# Altium PCB PCB2.PcbDoc (part 1 of 3)
Units mil, origin at the board's own origin, x right, y up, seen from the top; angles counter-clockwise.
Board outline 6000 x 4000 mil, 2 copper layers (Top Layer, Bottom Layer); 202 components, 201 nets, 407 pads, 100 vias.
Unrouted connection lines stored in the file: 105.
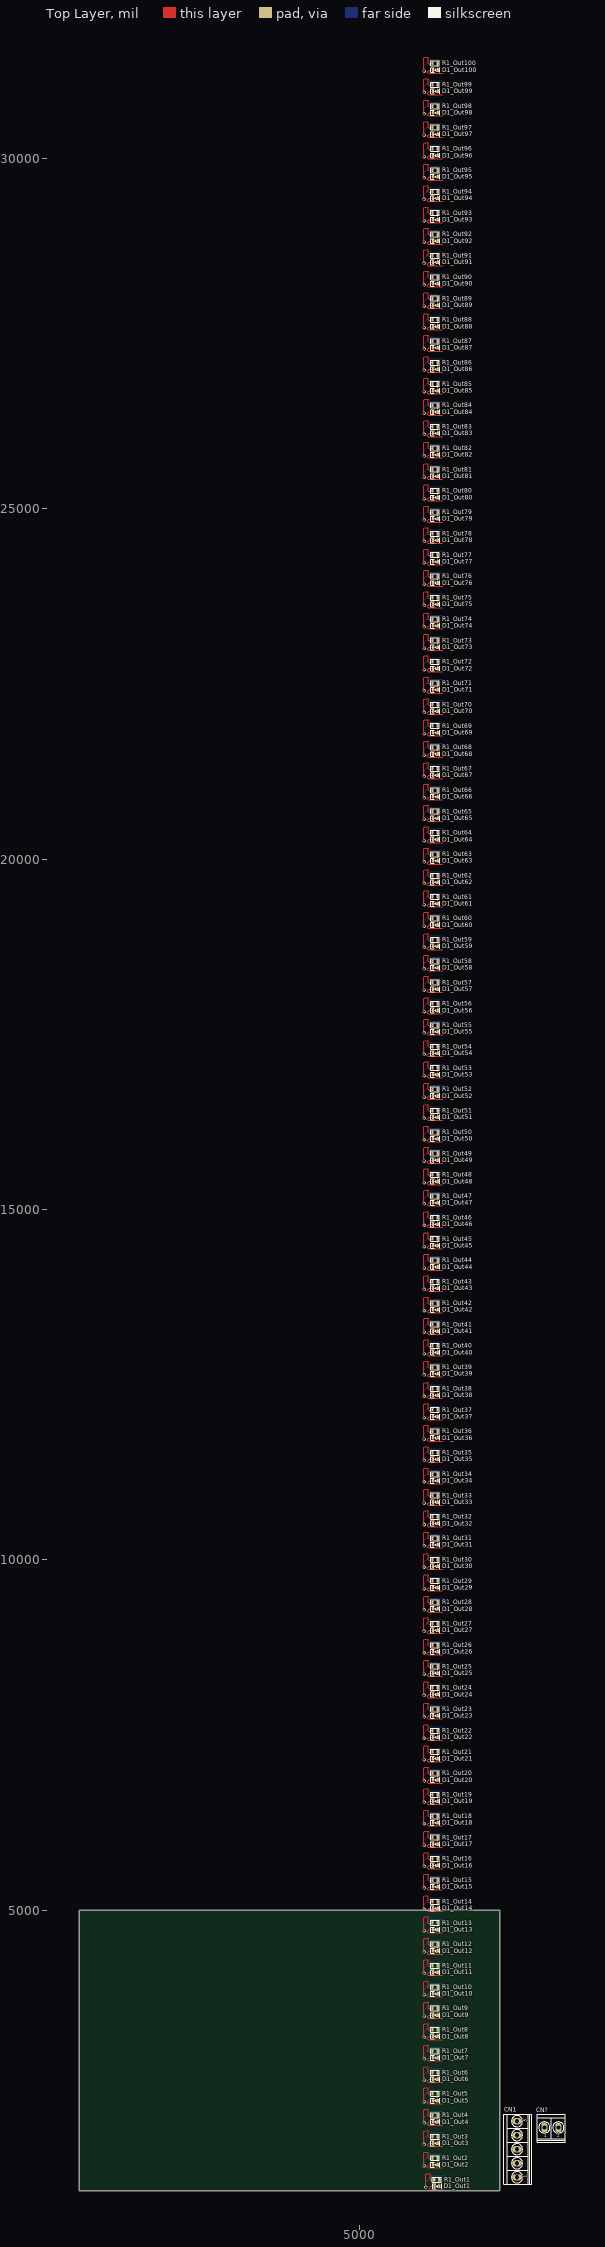
[diagram p0: Top Layer view]
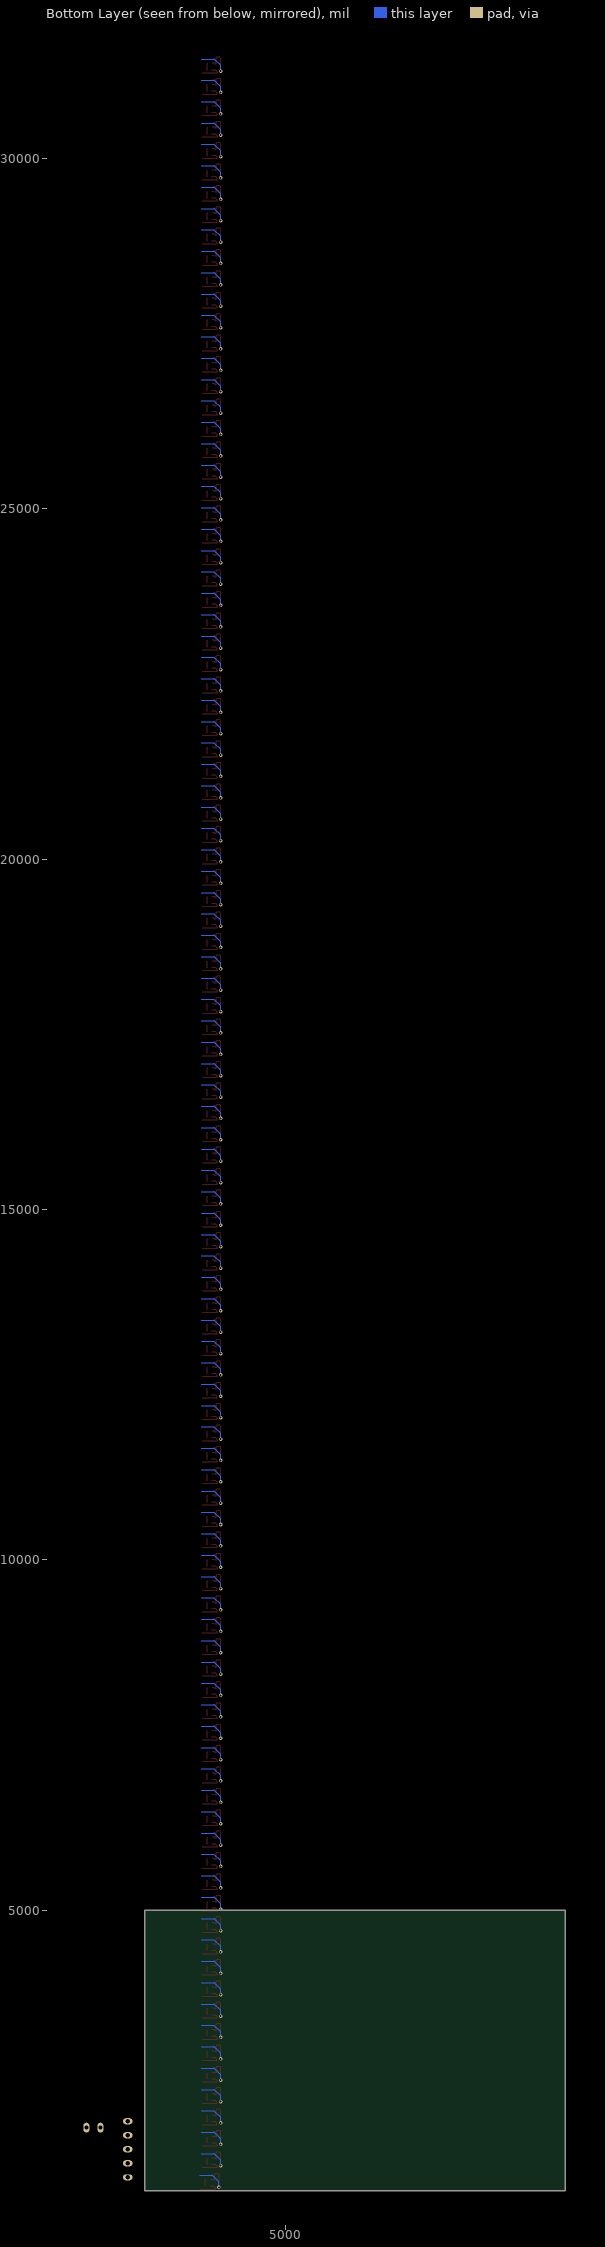
[diagram p1: Bottom Layer view, seen from below]

## Layer stack, top to bottom
Top Solder: solder mask 0.4, Solder Resist, Dk 3.5
Top Layer: signal copper 1.4
Dielectric 1: dielectric 12.6, FR-4, Dk 4.8
Bottom Layer: signal copper 1.4
Bottom Solder: solder mask 0.4, Solder Resist, Dk 3.5

## Board outline
1000,1000 7000,1000 7000,5000 1000,5000

## Design rules (kind name [scope] priority, off if disabled: settings)
Clearance [All] p1: gap=10 ignorepadtopadclearanceinfootprint=FALSE except(0: Arc-Hole Track-Hole SMDPad-Hole THPad-Hole Via-Hole Fill-Hole Poly-Hole Region-Hole Text-Hole)
PolygonConnect [All] p1: connectstyle=Relief reliefconductorwidth=10 reliefentries=4 polygonreliefangle="90 Angle" airgapwidth=10
RoomDefinition Sheet2 [InComponentClass('Sheet2')] p1: confinementstyle=ConfineIn formatcopy=TRUE lockcomponents=FALSE outline 7045,1060 7945,1060 7945,2200 7045,2200
RoomDefinition Out100 [InComponentClass('Out100')] p2: confinementstyle=ConfineIn formatcopy=TRUE lockcomponents=FALSE outline 5895,31200 6720,31200 6720,31460 5895,31460
RoomDefinition Out99 [InComponentClass('Out99')] p3: confinementstyle=ConfineIn formatcopy=TRUE lockcomponents=FALSE outline 5895,30895 6720,30895 6720,31155 5895,31155
RoomDefinition Out98 [InComponentClass('Out98')] p4: confinementstyle=ConfineIn formatcopy=TRUE lockcomponents=FALSE outline 5895,30590 6720,30590 6720,30850 5895,30850
RoomDefinition Out97 [InComponentClass('Out97')] p5: confinementstyle=ConfineIn formatcopy=TRUE lockcomponents=FALSE outline 5895,30285 6720,30285 6720,30545 5895,30545
RoomDefinition Out96 [InComponentClass('Out96')] p6: confinementstyle=ConfineIn formatcopy=TRUE lockcomponents=FALSE outline 5895,29980 6720,29980 6720,30240 5895,30240
RoomDefinition Out95 [InComponentClass('Out95')] p7: confinementstyle=ConfineIn formatcopy=TRUE lockcomponents=FALSE outline 5895,29675 6720,29675 6720,29935 5895,29935
RoomDefinition Out94 [InComponentClass('Out94')] p8: confinementstyle=ConfineIn formatcopy=TRUE lockcomponents=FALSE outline 5895,29370 6720,29370 6720,29630 5895,29630
RoomDefinition Out93 [InComponentClass('Out93')] p9: confinementstyle=ConfineIn formatcopy=TRUE lockcomponents=FALSE outline 5895,29065 6720,29065 6720,29325 5895,29325
RoomDefinition Out92 [InComponentClass('Out92')] p10: confinementstyle=ConfineIn formatcopy=TRUE lockcomponents=FALSE outline 5895,28760 6720,28760 6720,29020 5895,29020
RoomDefinition Out91 [InComponentClass('Out91')] p11: confinementstyle=ConfineIn formatcopy=TRUE lockcomponents=FALSE outline 5895,28455 6720,28455 6720,28715 5895,28715
RoomDefinition Out90 [InComponentClass('Out90')] p12: confinementstyle=ConfineIn formatcopy=TRUE lockcomponents=FALSE outline 5895,28150 6720,28150 6720,28410 5895,28410
RoomDefinition Out89 [InComponentClass('Out89')] p13: confinementstyle=ConfineIn formatcopy=TRUE lockcomponents=FALSE outline 5895,27845 6720,27845 6720,28105 5895,28105
RoomDefinition Out88 [InComponentClass('Out88')] p14: confinementstyle=ConfineIn formatcopy=TRUE lockcomponents=FALSE outline 5895,27540 6720,27540 6720,27800 5895,27800
RoomDefinition Out87 [InComponentClass('Out87')] p15: confinementstyle=ConfineIn formatcopy=TRUE lockcomponents=FALSE outline 5895,27235 6720,27235 6720,27495 5895,27495
RoomDefinition Out86 [InComponentClass('Out86')] p16: confinementstyle=ConfineIn formatcopy=TRUE lockcomponents=FALSE outline 5895,26930 6720,26930 6720,27190 5895,27190
RoomDefinition Out85 [InComponentClass('Out85')] p17: confinementstyle=ConfineIn formatcopy=TRUE lockcomponents=FALSE outline 5895,26625 6720,26625 6720,26885 5895,26885
RoomDefinition Out84 [InComponentClass('Out84')] p18: confinementstyle=ConfineIn formatcopy=TRUE lockcomponents=FALSE outline 5895,26320 6720,26320 6720,26580 5895,26580
RoomDefinition Out83 [InComponentClass('Out83')] p19: confinementstyle=ConfineIn formatcopy=TRUE lockcomponents=FALSE outline 5895,26015 6720,26015 6720,26275 5895,26275
RoomDefinition Out82 [InComponentClass('Out82')] p20: confinementstyle=ConfineIn formatcopy=TRUE lockcomponents=FALSE outline 5895,25710 6720,25710 6720,25970 5895,25970
RoomDefinition Out81 [InComponentClass('Out81')] p21: confinementstyle=ConfineIn formatcopy=TRUE lockcomponents=FALSE outline 5895,25405 6720,25405 6720,25665 5895,25665
RoomDefinition Out80 [InComponentClass('Out80')] p22: confinementstyle=ConfineIn formatcopy=TRUE lockcomponents=FALSE outline 5895,25100 6720,25100 6720,25360 5895,25360
RoomDefinition Out79 [InComponentClass('Out79')] p23: confinementstyle=ConfineIn formatcopy=TRUE lockcomponents=FALSE outline 5895,24795 6720,24795 6720,25055 5895,25055
RoomDefinition Out78 [InComponentClass('Out78')] p24: confinementstyle=ConfineIn formatcopy=TRUE lockcomponents=FALSE outline 5895,24490 6720,24490 6720,24750 5895,24750
RoomDefinition Out77 [InComponentClass('Out77')] p25: confinementstyle=ConfineIn formatcopy=TRUE lockcomponents=FALSE outline 5895,24185 6720,24185 6720,24445 5895,24445
RoomDefinition Out76 [InComponentClass('Out76')] p26: confinementstyle=ConfineIn formatcopy=TRUE lockcomponents=FALSE outline 5895,23880 6720,23880 6720,24140 5895,24140
RoomDefinition Out75 [InComponentClass('Out75')] p27: confinementstyle=ConfineIn formatcopy=TRUE lockcomponents=FALSE outline 5895,23575 6720,23575 6720,23835 5895,23835
RoomDefinition Out74 [InComponentClass('Out74')] p28: confinementstyle=ConfineIn formatcopy=TRUE lockcomponents=FALSE outline 5895,23270 6720,23270 6720,23530 5895,23530
RoomDefinition Out73 [InComponentClass('Out73')] p29: confinementstyle=ConfineIn formatcopy=TRUE lockcomponents=FALSE outline 5895,22965 6720,22965 6720,23225 5895,23225
RoomDefinition Out72 [InComponentClass('Out72')] p30: confinementstyle=ConfineIn formatcopy=TRUE lockcomponents=FALSE outline 5895,22660 6720,22660 6720,22920 5895,22920
RoomDefinition Out71 [InComponentClass('Out71')] p31: confinementstyle=ConfineIn formatcopy=TRUE lockcomponents=FALSE outline 5895,22355 6720,22355 6720,22615 5895,22615
RoomDefinition Out70 [InComponentClass('Out70')] p32: confinementstyle=ConfineIn formatcopy=TRUE lockcomponents=FALSE outline 5895,22050 6720,22050 6720,22310 5895,22310
RoomDefinition Out69 [InComponentClass('Out69')] p33: confinementstyle=ConfineIn formatcopy=TRUE lockcomponents=FALSE outline 5895,21745 6720,21745 6720,22005 5895,22005
RoomDefinition Out68 [InComponentClass('Out68')] p34: confinementstyle=ConfineIn formatcopy=TRUE lockcomponents=FALSE outline 5895,21440 6720,21440 6720,21700 5895,21700
RoomDefinition Out67 [InComponentClass('Out67')] p35: confinementstyle=ConfineIn formatcopy=TRUE lockcomponents=FALSE outline 5895,21135 6720,21135 6720,21395 5895,21395
RoomDefinition Out66 [InComponentClass('Out66')] p36: confinementstyle=ConfineIn formatcopy=TRUE lockcomponents=FALSE outline 5895,20830 6720,20830 6720,21090 5895,21090
RoomDefinition Out65 [InComponentClass('Out65')] p37: confinementstyle=ConfineIn formatcopy=TRUE lockcomponents=FALSE outline 5895,20525 6720,20525 6720,20785 5895,20785
RoomDefinition Out64 [InComponentClass('Out64')] p38: confinementstyle=ConfineIn formatcopy=TRUE lockcomponents=FALSE outline 5895,20220 6720,20220 6720,20480 5895,20480
RoomDefinition Out63 [InComponentClass('Out63')] p39: confinementstyle=ConfineIn formatcopy=TRUE lockcomponents=FALSE outline 5895,19915 6720,19915 6720,20175 5895,20175
RoomDefinition Out62 [InComponentClass('Out62')] p40: confinementstyle=ConfineIn formatcopy=TRUE lockcomponents=FALSE outline 5895,19610 6720,19610 6720,19870 5895,19870
RoomDefinition Out61 [InComponentClass('Out61')] p41: confinementstyle=ConfineIn formatcopy=TRUE lockcomponents=FALSE outline 5895,19305 6720,19305 6720,19565 5895,19565
RoomDefinition Out60 [InComponentClass('Out60')] p42: confinementstyle=ConfineIn formatcopy=TRUE lockcomponents=FALSE outline 5895,19000 6720,19000 6720,19260 5895,19260
RoomDefinition Out59 [InComponentClass('Out59')] p43: confinementstyle=ConfineIn formatcopy=TRUE lockcomponents=FALSE outline 5895,18695 6720,18695 6720,18955 5895,18955
RoomDefinition Out58 [InComponentClass('Out58')] p44: confinementstyle=ConfineIn formatcopy=TRUE lockcomponents=FALSE outline 5895,18390 6720,18390 6720,18650 5895,18650
RoomDefinition Out57 [InComponentClass('Out57')] p45: confinementstyle=ConfineIn formatcopy=TRUE lockcomponents=FALSE outline 5895,18085 6720,18085 6720,18345 5895,18345
RoomDefinition Out56 [InComponentClass('Out56')] p46: confinementstyle=ConfineIn formatcopy=TRUE lockcomponents=FALSE outline 5895,17780 6720,17780 6720,18040 5895,18040
RoomDefinition Out55 [InComponentClass('Out55')] p47: confinementstyle=ConfineIn formatcopy=TRUE lockcomponents=FALSE outline 5895,17475 6720,17475 6720,17735 5895,17735
RoomDefinition Out54 [InComponentClass('Out54')] p48: confinementstyle=ConfineIn formatcopy=TRUE lockcomponents=FALSE outline 5895,17170 6720,17170 6720,17430 5895,17430
RoomDefinition Out53 [InComponentClass('Out53')] p49: confinementstyle=ConfineIn formatcopy=TRUE lockcomponents=FALSE outline 5895,16865 6720,16865 6720,17125 5895,17125
RoomDefinition Out52 [InComponentClass('Out52')] p50: confinementstyle=ConfineIn formatcopy=TRUE lockcomponents=FALSE outline 5895,16560 6720,16560 6720,16820 5895,16820
RoomDefinition Out51 [InComponentClass('Out51')] p51: confinementstyle=ConfineIn formatcopy=TRUE lockcomponents=FALSE outline 5895,16255 6720,16255 6720,16515 5895,16515
RoomDefinition Out50 [InComponentClass('Out50')] p52: confinementstyle=ConfineIn formatcopy=TRUE lockcomponents=FALSE outline 5895,15950 6720,15950 6720,16210 5895,16210
RoomDefinition Out49 [InComponentClass('Out49')] p53: confinementstyle=ConfineIn formatcopy=TRUE lockcomponents=FALSE outline 5895,15645 6720,15645 6720,15905 5895,15905
RoomDefinition Out48 [InComponentClass('Out48')] p54: confinementstyle=ConfineIn formatcopy=TRUE lockcomponents=FALSE outline 5895,15340 6720,15340 6720,15600 5895,15600
RoomDefinition Out47 [InComponentClass('Out47')] p55: confinementstyle=ConfineIn formatcopy=TRUE lockcomponents=FALSE outline 5895,15035 6720,15035 6720,15295 5895,15295
RoomDefinition Out46 [InComponentClass('Out46')] p56: confinementstyle=ConfineIn formatcopy=TRUE lockcomponents=FALSE outline 5895,14730 6720,14730 6720,14990 5895,14990
RoomDefinition Out45 [InComponentClass('Out45')] p57: confinementstyle=ConfineIn formatcopy=TRUE lockcomponents=FALSE outline 5895,14425 6720,14425 6720,14685 5895,14685
RoomDefinition Out44 [InComponentClass('Out44')] p58: confinementstyle=ConfineIn formatcopy=TRUE lockcomponents=FALSE outline 5895,14120 6720,14120 6720,14380 5895,14380
RoomDefinition Out43 [InComponentClass('Out43')] p59: confinementstyle=ConfineIn formatcopy=TRUE lockcomponents=FALSE outline 5895,13815 6720,13815 6720,14075 5895,14075
RoomDefinition Out42 [InComponentClass('Out42')] p60: confinementstyle=ConfineIn formatcopy=TRUE lockcomponents=FALSE outline 5895,13510 6720,13510 6720,13770 5895,13770
RoomDefinition Out41 [InComponentClass('Out41')] p61: confinementstyle=ConfineIn formatcopy=TRUE lockcomponents=FALSE outline 5895,13205 6720,13205 6720,13465 5895,13465
RoomDefinition Out40 [InComponentClass('Out40')] p62: confinementstyle=ConfineIn formatcopy=TRUE lockcomponents=FALSE outline 5895,12900 6720,12900 6720,13160 5895,13160
RoomDefinition Out39 [InComponentClass('Out39')] p63: confinementstyle=ConfineIn formatcopy=TRUE lockcomponents=FALSE outline 5895,12595 6720,12595 6720,12855 5895,12855
RoomDefinition Out38 [InComponentClass('Out38')] p64: confinementstyle=ConfineIn formatcopy=TRUE lockcomponents=FALSE outline 5895,12290 6720,12290 6720,12550 5895,12550
RoomDefinition Out37 [InComponentClass('Out37')] p65: confinementstyle=ConfineIn formatcopy=TRUE lockcomponents=FALSE outline 5895,11985 6720,11985 6720,12245 5895,12245
RoomDefinition Out36 [InComponentClass('Out36')] p66: confinementstyle=ConfineIn formatcopy=TRUE lockcomponents=FALSE outline 5895,11680 6720,11680 6720,11940 5895,11940
RoomDefinition Out35 [InComponentClass('Out35')] p67: confinementstyle=ConfineIn formatcopy=TRUE lockcomponents=FALSE outline 5895,11375 6720,11375 6720,11635 5895,11635
RoomDefinition Out34 [InComponentClass('Out34')] p68: confinementstyle=ConfineIn formatcopy=TRUE lockcomponents=FALSE outline 5895,11070 6720,11070 6720,11330 5895,11330
RoomDefinition Out33 [InComponentClass('Out33')] p69: confinementstyle=ConfineIn formatcopy=TRUE lockcomponents=FALSE outline 5895,10765 6720,10765 6720,11025 5895,11025
RoomDefinition Out32 [InComponentClass('Out32')] p70: confinementstyle=ConfineIn formatcopy=TRUE lockcomponents=FALSE outline 5895,10460 6720,10460 6720,10720 5895,10720
RoomDefinition Out31 [InComponentClass('Out31')] p71: confinementstyle=ConfineIn formatcopy=TRUE lockcomponents=FALSE outline 5895,10155 6720,10155 6720,10415 5895,10415
RoomDefinition Out30 [InComponentClass('Out30')] p72: confinementstyle=ConfineIn formatcopy=TRUE lockcomponents=FALSE outline 5895,9850 6720,9850 6720,10110 5895,10110
RoomDefinition Out29 [InComponentClass('Out29')] p73: confinementstyle=ConfineIn formatcopy=TRUE lockcomponents=FALSE outline 5895,9545 6720,9545 6720,9805 5895,9805
RoomDefinition Out28 [InComponentClass('Out28')] p74: confinementstyle=ConfineIn formatcopy=TRUE lockcomponents=FALSE outline 5895,9240 6720,9240 6720,9500 5895,9500
RoomDefinition Out27 [InComponentClass('Out27')] p75: confinementstyle=ConfineIn formatcopy=TRUE lockcomponents=FALSE outline 5895,8935 6720,8935 6720,9195 5895,9195
RoomDefinition Out26 [InComponentClass('Out26')] p76: confinementstyle=ConfineIn formatcopy=TRUE lockcomponents=FALSE outline 5895,8630 6720,8630 6720,8890 5895,8890
RoomDefinition Out25 [InComponentClass('Out25')] p77: confinementstyle=ConfineIn formatcopy=TRUE lockcomponents=FALSE outline 5895,8325 6720,8325 6720,8585 5895,8585
RoomDefinition Out24 [InComponentClass('Out24')] p78: confinementstyle=ConfineIn formatcopy=TRUE lockcomponents=FALSE outline 5895,8020 6720,8020 6720,8280 5895,8280
RoomDefinition Out23 [InComponentClass('Out23')] p79: confinementstyle=ConfineIn formatcopy=TRUE lockcomponents=FALSE outline 5895,7715 6720,7715 6720,7975 5895,7975
RoomDefinition Out22 [InComponentClass('Out22')] p80: confinementstyle=ConfineIn formatcopy=TRUE lockcomponents=FALSE outline 5895,7410 6720,7410 6720,7670 5895,7670
RoomDefinition Out21 [InComponentClass('Out21')] p81: confinementstyle=ConfineIn formatcopy=TRUE lockcomponents=FALSE outline 5895,7105 6720,7105 6720,7365 5895,7365
RoomDefinition Out20 [InComponentClass('Out20')] p82: confinementstyle=ConfineIn formatcopy=TRUE lockcomponents=FALSE outline 5895,6800 6720,6800 6720,7060 5895,7060
RoomDefinition Out19 [InComponentClass('Out19')] p83: confinementstyle=ConfineIn formatcopy=TRUE lockcomponents=FALSE outline 5895,6495 6720,6495 6720,6755 5895,6755
RoomDefinition Out18 [InComponentClass('Out18')] p84: confinementstyle=ConfineIn formatcopy=TRUE lockcomponents=FALSE outline 5895,6190 6720,6190 6720,6450 5895,6450
RoomDefinition Out17 [InComponentClass('Out17')] p85: confinementstyle=ConfineIn formatcopy=TRUE lockcomponents=FALSE outline 5895,5885 6720,5885 6720,6145 5895,6145
RoomDefinition Out16 [InComponentClass('Out16')] p86: confinementstyle=ConfineIn formatcopy=TRUE lockcomponents=FALSE outline 5895,5580 6720,5580 6720,5840 5895,5840
RoomDefinition Out15 [InComponentClass('Out15')] p87: confinementstyle=ConfineIn formatcopy=TRUE lockcomponents=FALSE outline 5895,5275 6720,5275 6720,5535 5895,5535
RoomDefinition Out14 [InComponentClass('Out14')] p88: confinementstyle=ConfineIn formatcopy=TRUE lockcomponents=FALSE outline 5895,4970 6720,4970 6720,5230 5895,5230
RoomDefinition Out13 [InComponentClass('Out13')] p89: confinementstyle=ConfineIn formatcopy=TRUE lockcomponents=FALSE outline 5895,4665 6720,4665 6720,4925 5895,4925
RoomDefinition Out12 [InComponentClass('Out12')] p90: confinementstyle=ConfineIn formatcopy=TRUE lockcomponents=FALSE outline 5895,4360 6720,4360 6720,4620 5895,4620
RoomDefinition Out11 [InComponentClass('Out11')] p91: confinementstyle=ConfineIn formatcopy=TRUE lockcomponents=FALSE outline 5895,4055 6720,4055 6720,4315 5895,4315
RoomDefinition Out10 [InComponentClass('Out10')] p92: confinementstyle=ConfineIn formatcopy=TRUE lockcomponents=FALSE outline 5895,3750 6720,3750 6720,4010 5895,4010
RoomDefinition Out9 [InComponentClass('Out9')] p93: confinementstyle=ConfineIn formatcopy=TRUE lockcomponents=FALSE outline 5895,3445 6720,3445 6720,3705 5895,3705
RoomDefinition Out8 [InComponentClass('Out8')] p94: confinementstyle=ConfineIn formatcopy=TRUE lockcomponents=FALSE outline 5895,3140 6720,3140 6720,3400 5895,3400
RoomDefinition Out7 [InComponentClass('Out7')] p95: confinementstyle=ConfineIn formatcopy=TRUE lockcomponents=FALSE outline 5895,2835 6720,2835 6720,3095 5895,3095
RoomDefinition Out6 [InComponentClass('Out6')] p96: confinementstyle=ConfineIn formatcopy=TRUE lockcomponents=FALSE outline 5895,2530 6720,2530 6720,2790 5895,2790
RoomDefinition Out5 [InComponentClass('Out5')] p97: confinementstyle=ConfineIn formatcopy=TRUE lockcomponents=FALSE outline 5895,2225 6720,2225 6720,2485 5895,2485
RoomDefinition Out4 [InComponentClass('Out4')] p98: confinementstyle=ConfineIn formatcopy=TRUE lockcomponents=FALSE outline 5895,1920 6720,1920 6720,2180 5895,2180
RoomDefinition Out3 [InComponentClass('Out3')] p99: confinementstyle=ConfineIn formatcopy=TRUE lockcomponents=FALSE outline 5895,1615 6720,1615 6720,1875 5895,1875
RoomDefinition Out2 [InComponentClass('Out2')] p100: confinementstyle=ConfineIn formatcopy=TRUE lockcomponents=FALSE outline 5895,1310 6720,1310 6720,1570 5895,1570
RoomDefinition Out1 [InComponentClass('Out1')] p101: confinementstyle=ConfineIn formatcopy=TRUE lockcomponents=FALSE outline 5919.57,1000 6744.57,1000 6744.57,1260 5919.57,1260
RoutingVias [All] p1: holewidth=28 width=50 viastyle="Through Hole" minholewidth=28 minwidth=50 maxholewidth=28 maxwidth=50
SolderMaskExpansion [All] p1: expansion=4 istentingtop=FALSE
Width [All] p1: maxlimit=10 minlimit=10 preferedwidth=10
30 further rules are at their usual default settings.

## Classes and differential pairs
channel class Output: Out1 Out2 Out3 Out4 Out5 Out6 Out7 Out8 Out9 Out10 Out11 Out12 Out13 Out14 Out15 Out16 Out17 Out18 Out19 Out20 Out21 Out22 Out23 Out24 Out25 Out26 Out27 Out28 Out29 Out30 Out31 Out32 Out33 Out34 Out35 Out36 Out37 Out38 Out39 Out40 Out41 Out42 Out43 Out44 Out45 Out46 Out47 Out48 Out49 Out50 Out51 Out52 Out53 Out54 Out55 Out56 Out57 Out58 Out59 Out60 Out61 Out62 Out63 Out64 Out65 Out66 Out67 Out68 Out69 Out70 Out71 Out72 Out73 Out74 Out75 Out76 Out77 Out78 Out79 Out80 Out81 Out82 Out83 Out84 Out85 Out86 Out87 Out88 Out89 Out90 Out91 Out92 Out93 Out94 Out95 Out96 Out97 Out98 Out99 Out100
net class IN[1..5]: IN1 IN2 IN3 IN4 IN5
component class Sheet2: CN1 CN?
component class Out100: D1_Out100 R1_Out100
component class Out99: D1_Out99 R1_Out99
component class Out98: D1_Out98 R1_Out98
component class Out97: D1_Out97 R1_Out97
component class Out96: D1_Out96 R1_Out96
component class Out95: D1_Out95 R1_Out95
component class Out94: D1_Out94 R1_Out94
component class Out93: D1_Out93 R1_Out93
component class Out92: D1_Out92 R1_Out92
component class Out91: D1_Out91 R1_Out91
component class Out90: D1_Out90 R1_Out90
component class Out89: D1_Out89 R1_Out89
component class Out88: D1_Out88 R1_Out88
component class Out87: D1_Out87 R1_Out87
component class Out86: D1_Out86 R1_Out86
component class Out85: D1_Out85 R1_Out85
component class Out84: D1_Out84 R1_Out84
component class Out83: D1_Out83 R1_Out83
component class Out82: D1_Out82 R1_Out82
component class Out81: D1_Out81 R1_Out81
component class Out80: D1_Out80 R1_Out80
component class Out79: D1_Out79 R1_Out79
component class Out78: D1_Out78 R1_Out78
component class Out77: D1_Out77 R1_Out77
component class Out76: D1_Out76 R1_Out76
component class Out75: D1_Out75 R1_Out75
component class Out74: D1_Out74 R1_Out74
component class Out73: D1_Out73 R1_Out73
component class Out72: D1_Out72 R1_Out72
component class Out71: D1_Out71 R1_Out71
component class Out70: D1_Out70 R1_Out70
component class Out69: D1_Out69 R1_Out69
component class Out68: D1_Out68 R1_Out68
component class Out67: D1_Out67 R1_Out67
component class Out66: D1_Out66 R1_Out66
component class Out65: D1_Out65 R1_Out65
component class Out64: D1_Out64 R1_Out64
component class Out63: D1_Out63 R1_Out63
component class Out62: D1_Out62 R1_Out62
component class Out61: D1_Out61 R1_Out61
component class Out60: D1_Out60 R1_Out60
component class Out59: D1_Out59 R1_Out59
component class Out58: D1_Out58 R1_Out58
component class Out57: D1_Out57 R1_Out57
component class Out56: D1_Out56 R1_Out56
component class Out55: D1_Out55 R1_Out55
component class Out54: D1_Out54 R1_Out54
component class Out53: D1_Out53 R1_Out53
component class Out52: D1_Out52 R1_Out52
component class Out51: D1_Out51 R1_Out51
component class Out50: D1_Out50 R1_Out50
component class Out49: D1_Out49 R1_Out49
component class Out48: D1_Out48 R1_Out48
component class Out47: D1_Out47 R1_Out47
component class Out46: D1_Out46 R1_Out46
component class Out45: D1_Out45 R1_Out45
component class Out44: D1_Out44 R1_Out44
component class Out43: D1_Out43 R1_Out43
component class Out42: D1_Out42 R1_Out42
component class Out41: D1_Out41 R1_Out41
component class Out40: D1_Out40 R1_Out40
component class Out39: D1_Out39 R1_Out39
component class Out38: D1_Out38 R1_Out38
component class Out37: D1_Out37 R1_Out37
component class Out36: D1_Out36 R1_Out36
component class Out35: D1_Out35 R1_Out35
component class Out34: D1_Out34 R1_Out34
component class Out33: D1_Out33 R1_Out33
component class Out32: D1_Out32 R1_Out32
component class Out31: D1_Out31 R1_Out31
component class Out30: D1_Out30 R1_Out30
component class Out29: D1_Out29 R1_Out29
component class Out28: D1_Out28 R1_Out28
component class Out27: D1_Out27 R1_Out27
component class Out26: D1_Out26 R1_Out26
component class Out25: D1_Out25 R1_Out25
component class Out24: D1_Out24 R1_Out24
component class Out23: D1_Out23 R1_Out23
component class Out22: D1_Out22 R1_Out22
component class Out21: D1_Out21 R1_Out21
component class Out20: D1_Out20 R1_Out20
component class Out19: D1_Out19 R1_Out19
component class Out18: D1_Out18 R1_Out18
component class Out17: D1_Out17 R1_Out17
component class Out16: D1_Out16 R1_Out16
component class Out15: D1_Out15 R1_Out15
component class Out14: D1_Out14 R1_Out14
component class Out13: D1_Out13 R1_Out13
component class Out12: D1_Out12 R1_Out12
component class Out11: D1_Out11 R1_Out11
component class Out10: D1_Out10 R1_Out10
component class Out9: D1_Out9 R1_Out9
component class Out8: D1_Out8 R1_Out8
component class Out7: D1_Out7 R1_Out7
component class Out6: D1_Out6 R1_Out6
component class Out5: D1_Out5 R1_Out5
component class Out4: D1_Out4 R1_Out4
component class Out3: D1_Out3 R1_Out3
component class Out2: D1_Out2 R1_Out2
component class Out1: D1_Out1 R1_Out1

## Components (designator, comment, footprint, x,y, rotation, side; value= is the part's Value field where it differs from the comment)
CN1 "TB-05" TB508-05 7245,1590 r90 top
CN? "TB508-02" TB508-02 7735,1900 r0 top
D1_Out1 "LED" LED-0805 6104.57,1060 r0 top (schematic designator D1)
D1_Out2 "LED" LED-0805 6080,1370 r0 top (schematic designator D1)
D1_Out3 "LED" LED-0805 6080,1675 r0 top (schematic designator D1)
D1_Out4 "LED" LED-0805 6080,1980 r0 top (schematic designator D1)
D1_Out5 "LED" LED-0805 6080,2285 r0 top (schematic designator D1)
D1_Out6 "LED" LED-0805 6080,2590 r0 top (schematic designator D1)
D1_Out7 "LED" LED-0805 6080,2895 r0 top (schematic designator D1)
D1_Out8 "LED" LED-0805 6080,3200 r0 top (schematic designator D1)
D1_Out9 "LED" LED-0805 6080,3505 r0 top (schematic designator D1)
D1_Out10 "LED" LED-0805 6080,3810 r0 top (schematic designator D1)
D1_Out11 "LED" LED-0805 6080,4115 r0 top (schematic designator D1)
D1_Out12 "LED" LED-0805 6080,4420 r0 top (schematic designator D1)
D1_Out13 "LED" LED-0805 6080,4725 r0 top (schematic designator D1)
D1_Out14 "LED" LED-0805 6080,5030 r0 top (schematic designator D1)
D1_Out15 "LED" LED-0805 6080,5335 r0 top (schematic designator D1)
D1_Out16 "LED" LED-0805 6080,5640 r0 top (schematic designator D1)
D1_Out17 "LED" LED-0805 6080,5945 r0 top (schematic designator D1)
D1_Out18 "LED" LED-0805 6080,6250 r0 top (schematic designator D1)
D1_Out19 "LED" LED-0805 6080,6555 r0 top (schematic designator D1)
D1_Out20 "LED" LED-0805 6080,6860 r0 top (schematic designator D1)
D1_Out21 "LED" LED-0805 6080,7165 r0 top (schematic designator D1)
D1_Out22 "LED" LED-0805 6080,7470 r0 top (schematic designator D1)
D1_Out23 "LED" LED-0805 6080,7775 r0 top (schematic designator D1)
D1_Out24 "LED" LED-0805 6080,8080 r0 top (schematic designator D1)
D1_Out25 "LED" LED-0805 6080,8385 r0 top (schematic designator D1)
D1_Out26 "LED" LED-0805 6080,8690 r0 top (schematic designator D1)
D1_Out27 "LED" LED-0805 6080,8995 r0 top (schematic designator D1)
D1_Out28 "LED" LED-0805 6080,9300 r0 top (schematic designator D1)
D1_Out29 "LED" LED-0805 6080,9605 r0 top (schematic designator D1)
D1_Out30 "LED" LED-0805 6080,9910 r0 top (schematic designator D1)
D1_Out31 "LED" LED-0805 6080,10215 r0 top (schematic designator D1)
D1_Out32 "LED" LED-0805 6080,10520 r0 top (schematic designator D1)
D1_Out33 "LED" LED-0805 6080,10825 r0 top (schematic designator D1)
D1_Out34 "LED" LED-0805 6080,11130 r0 top (schematic designator D1)
D1_Out35 "LED" LED-0805 6080,11435 r0 top (schematic designator D1)
D1_Out36 "LED" LED-0805 6080,11740 r0 top (schematic designator D1)
D1_Out37 "LED" LED-0805 6080,12045 r0 top (schematic designator D1)
D1_Out38 "LED" LED-0805 6080,12350 r0 top (schematic designator D1)
D1_Out39 "LED" LED-0805 6080,12655 r0 top (schematic designator D1)
D1_Out40 "LED" LED-0805 6080,12960 r0 top (schematic designator D1)
D1_Out41 "LED" LED-0805 6080,13265 r0 top (schematic designator D1)
D1_Out42 "LED" LED-0805 6080,13570 r0 top (schematic designator D1)
D1_Out43 "LED" LED-0805 6080,13875 r0 top (schematic designator D1)
D1_Out44 "LED" LED-0805 6080,14180 r0 top (schematic designator D1)
D1_Out45 "LED" LED-0805 6080,14485 r0 top (schematic designator D1)
D1_Out46 "LED" LED-0805 6080,14790 r0 top (schematic designator D1)
D1_Out47 "LED" LED-0805 6080,15095 r0 top (schematic designator D1)
D1_Out48 "LED" LED-0805 6080,15400 r0 top (schematic designator D1)
D1_Out49 "LED" LED-0805 6080,15705 r0 top (schematic designator D1)
D1_Out50 "LED" LED-0805 6080,16010 r0 top (schematic designator D1)
D1_Out51 "LED" LED-0805 6080,16315 r0 top (schematic designator D1)
D1_Out52 "LED" LED-0805 6080,16620 r0 top (schematic designator D1)
D1_Out53 "LED" LED-0805 6080,16925 r0 top (schematic designator D1)
D1_Out54 "LED" LED-0805 6080,17230 r0 top (schematic designator D1)
D1_Out55 "LED" LED-0805 6080,17535 r0 top (schematic designator D1)
D1_Out56 "LED" LED-0805 6080,17840 r0 top (schematic designator D1)
D1_Out57 "LED" LED-0805 6080,18145 r0 top (schematic designator D1)
D1_Out58 "LED" LED-0805 6080,18450 r0 top (schematic designator D1)
D1_Out59 "LED" LED-0805 6080,18755 r0 top (schematic designator D1)
D1_Out60 "LED" LED-0805 6080,19060 r0 top (schematic designator D1)
D1_Out61 "LED" LED-0805 6080,19365 r0 top (schematic designator D1)
D1_Out62 "LED" LED-0805 6080,19670 r0 top (schematic designator D1)
D1_Out63 "LED" LED-0805 6080,19975 r0 top (schematic designator D1)
D1_Out64 "LED" LED-0805 6080,20280 r0 top (schematic designator D1)
D1_Out65 "LED" LED-0805 6080,20585 r0 top (schematic designator D1)
D1_Out66 "LED" LED-0805 6080,20890 r0 top (schematic designator D1)
D1_Out67 "LED" LED-0805 6080,21195 r0 top (schematic designator D1)
D1_Out68 "LED" LED-0805 6080,21500 r0 top (schematic designator D1)
D1_Out69 "LED" LED-0805 6080,21805 r0 top (schematic designator D1)
D1_Out70 "LED" LED-0805 6080,22110 r0 top (schematic designator D1)
D1_Out71 "LED" LED-0805 6080,22415 r0 top (schematic designator D1)
D1_Out72 "LED" LED-0805 6080,22720 r0 top (schematic designator D1)
D1_Out73 "LED" LED-0805 6080,23025 r0 top (schematic designator D1)
D1_Out74 "LED" LED-0805 6080,23330 r0 top (schematic designator D1)
D1_Out75 "LED" LED-0805 6080,23635 r0 top (schematic designator D1)
D1_Out76 "LED" LED-0805 6080,23940 r0 top (schematic designator D1)
D1_Out77 "LED" LED-0805 6080,24245 r0 top (schematic designator D1)
D1_Out78 "LED" LED-0805 6080,24550 r0 top (schematic designator D1)
D1_Out79 "LED" LED-0805 6080,24855 r0 top (schematic designator D1)
D1_Out80 "LED" LED-0805 6080,25160 r0 top (schematic designator D1)
D1_Out81 "LED" LED-0805 6080,25465 r0 top (schematic designator D1)
D1_Out82 "LED" LED-0805 6080,25770 r0 top (schematic designator D1)
D1_Out83 "LED" LED-0805 6080,26075 r0 top (schematic designator D1)
D1_Out84 "LED" LED-0805 6080,26380 r0 top (schematic designator D1)
D1_Out85 "LED" LED-0805 6080,26685 r0 top (schematic designator D1)
D1_Out86 "LED" LED-0805 6080,26990 r0 top (schematic designator D1)
D1_Out87 "LED" LED-0805 6080,27295 r0 top (schematic designator D1)
D1_Out88 "LED" LED-0805 6080,27600 r0 top (schematic designator D1)
D1_Out89 "LED" LED-0805 6080,27905 r0 top (schematic designator D1)
D1_Out90 "LED" LED-0805 6080,28210 r0 top (schematic designator D1)
D1_Out91 "LED" LED-0805 6080,28515 r0 top (schematic designator D1)
D1_Out92 "LED" LED-0805 6080,28820 r0 top (schematic designator D1)
D1_Out93 "LED" LED-0805 6080,29125 r0 top (schematic designator D1)
D1_Out94 "LED" LED-0805 6080,29430 r0 top (schematic designator D1)
D1_Out95 "LED" LED-0805 6080,29735 r0 top (schematic designator D1)
D1_Out96 "LED" LED-0805 6080,30040 r0 top (schematic designator D1)
D1_Out97 "LED" LED-0805 6080,30345 r0 top (schematic designator D1)
D1_Out98 "LED" LED-0805 6080,30650 r0 top (schematic designator D1)
D1_Out99 "LED" LED-0805 6080,30955 r0 top (schematic designator D1)
D1_Out100 "LED" LED-0805 6080,31260 r0 top (schematic designator D1)
R1_Out1 "1k0" R0805 6099.57,1155 r180 top (schematic designator R1)
R1_Out2 "1k0" R0805 6075,1465 r180 top (schematic designator R1)
R1_Out3 "1k0" R0805 6075,1770 r180 top (schematic designator R1)
R1_Out4 "1k0" R0805 6075,2075 r180 top (schematic designator R1)
R1_Out5 "1k0" R0805 6075,2380 r180 top (schematic designator R1)
R1_Out6 "1k0" R0805 6075,2685 r180 top (schematic designator R1)
R1_Out7 "1k0" R0805 6075,2990 r180 top (schematic designator R1)
R1_Out8 "1k0" R0805 6075,3295 r180 top (schematic designator R1)
R1_Out9 "1k0" R0805 6075,3600 r180 top (schematic designator R1)
R1_Out10 "1k0" R0805 6075,3905 r180 top (schematic designator R1)
R1_Out11 "1k0" R0805 6075,4210 r180 top (schematic designator R1)
R1_Out12 "1k0" R0805 6075,4515 r180 top (schematic designator R1)
R1_Out13 "1k0" R0805 6075,4820 r180 top (schematic designator R1)
R1_Out14 "1k0" R0805 6075,5125 r180 top (schematic designator R1)
R1_Out15 "1k0" R0805 6075,5430 r180 top (schematic designator R1)
R1_Out16 "1k0" R0805 6075,5735 r180 top (schematic designator R1)
R1_Out17 "1k0" R0805 6075,6040 r180 top (schematic designator R1)
R1_Out18 "1k0" R0805 6075,6345 r180 top (schematic designator R1)
R1_Out19 "1k0" R0805 6075,6650 r180 top (schematic designator R1)
R1_Out20 "1k0" R0805 6075,6955 r180 top (schematic designator R1)
R1_Out21 "1k0" R0805 6075,7260 r180 top (schematic designator R1)
R1_Out22 "1k0" R0805 6075,7565 r180 top (schematic designator R1)
R1_Out23 "1k0" R0805 6075,7870 r180 top (schematic designator R1)
R1_Out24 "1k0" R0805 6075,8175 r180 top (schematic designator R1)
R1_Out25 "1k0" R0805 6075,8480 r180 top (schematic designator R1)
R1_Out26 "1k0" R0805 6075,8785 r180 top (schematic designator R1)
R1_Out27 "1k0" R0805 6075,9090 r180 top (schematic designator R1)
R1_Out28 "1k0" R0805 6075,9395 r180 top (schematic designator R1)
R1_Out29 "1k0" R0805 6075,9700 r180 top (schematic designator R1)
R1_Out30 "1k0" R0805 6075,10005 r180 top (schematic designator R1)
R1_Out31 "1k0" R0805 6075,10310 r180 top (schematic designator R1)
R1_Out32 "1k0" R0805 6075,10615 r180 top (schematic designator R1)
R1_Out33 "1k0" R0805 6075,10920 r180 top (schematic designator R1)
R1_Out34 "1k0" R0805 6075,11225 r180 top (schematic designator R1)
R1_Out35 "1k0" R0805 6075,11530 r180 top (schematic designator R1)
R1_Out36 "1k0" R0805 6075,11835 r180 top (schematic designator R1)
R1_Out37 "1k0" R0805 6075,12140 r180 top (schematic designator R1)
R1_Out38 "1k0" R0805 6075,12445 r180 top (schematic designator R1)
R1_Out39 "1k0" R0805 6075,12750 r180 top (schematic designator R1)
R1_Out40 "1k0" R0805 6075,13055 r180 top (schematic designator R1)
R1_Out41 "1k0" R0805 6075,13360 r180 top (schematic designator R1)
R1_Out42 "1k0" R0805 6075,13665 r180 top (schematic designator R1)
R1_Out43 "1k0" R0805 6075,13970 r180 top (schematic designator R1)
R1_Out44 "1k0" R0805 6075,14275 r180 top (schematic designator R1)
R1_Out45 "1k0" R0805 6075,14580 r180 top (schematic designator R1)
R1_Out46 "1k0" R0805 6075,14885 r180 top (schematic designator R1)
R1_Out47 "1k0" R0805 6075,15190 r180 top (schematic designator R1)
R1_Out48 "1k0" R0805 6075,15495 r180 top (schematic designator R1)
R1_Out49 "1k0" R0805 6075,15800 r180 top (schematic designator R1)
R1_Out50 "1k0" R0805 6075,16105 r180 top (schematic designator R1)
R1_Out51 "1k0" R0805 6075,16410 r180 top (schematic designator R1)
R1_Out52 "1k0" R0805 6075,16715 r180 top (schematic designator R1)
R1_Out53 "1k0" R0805 6075,17020 r180 top (schematic designator R1)
R1_Out54 "1k0" R0805 6075,17325 r180 top (schematic designator R1)
R1_Out55 "1k0" R0805 6075,17630 r180 top (schematic designator R1)
R1_Out56 "1k0" R0805 6075,17935 r180 top (schematic designator R1)
R1_Out57 "1k0" R0805 6075,18240 r180 top (schematic designator R1)
R1_Out58 "1k0" R0805 6075,18545 r180 top (schematic designator R1)
R1_Out59 "1k0" R0805 6075,18850 r180 top (schematic designator R1)
R1_Out60 "1k0" R0805 6075,19155 r180 top (schematic designator R1)
R1_Out61 "1k0" R0805 6075,19460 r180 top (schematic designator R1)
R1_Out62 "1k0" R0805 6075,19765 r180 top (schematic designator R1)
R1_Out63 "1k0" R0805 6075,20070 r180 top (schematic designator R1)
R1_Out64 "1k0" R0805 6075,20375 r180 top (schematic designator R1)
R1_Out65 "1k0" R0805 6075,20680 r180 top (schematic designator R1)
R1_Out66 "1k0" R0805 6075,20985 r180 top (schematic designator R1)
R1_Out67 "1k0" R0805 6075,21290 r180 top (schematic designator R1)
R1_Out68 "1k0" R0805 6075,21595 r180 top (schematic designator R1)
R1_Out69 "1k0" R0805 6075,21900 r180 top (schematic designator R1)
R1_Out70 "1k0" R0805 6075,22205 r180 top (schematic designator R1)
R1_Out71 "1k0" R0805 6075,22510 r180 top (schematic designator R1)
R1_Out72 "1k0" R0805 6075,22815 r180 top (schematic designator R1)
R1_Out73 "1k0" R0805 6075,23120 r180 top (schematic designator R1)
R1_Out74 "1k0" R0805 6075,23425 r180 top (schematic designator R1)
R1_Out75 "1k0" R0805 6075,23730 r180 top (schematic designator R1)
R1_Out76 "1k0" R0805 6075,24035 r180 top (schematic designator R1)
R1_Out77 "1k0" R0805 6075,24340 r180 top (schematic designator R1)
R1_Out78 "1k0" R0805 6075,24645 r180 top (schematic designator R1)
R1_Out79 "1k0" R0805 6075,24950 r180 top (schematic designator R1)
R1_Out80 "1k0" R0805 6075,25255 r180 top (schematic designator R1)
R1_Out81 "1k0" R0805 6075,25560 r180 top (schematic designator R1)
R1_Out82 "1k0" R0805 6075,25865 r180 top (schematic designator R1)
R1_Out83 "1k0" R0805 6075,26170 r180 top (schematic designator R1)
R1_Out84 "1k0" R0805 6075,26475 r180 top (schematic designator R1)
R1_Out85 "1k0" R0805 6075,26780 r180 top (schematic designator R1)
R1_Out86 "1k0" R0805 6075,27085 r180 top (schematic designator R1)
R1_Out87 "1k0" R0805 6075,27390 r180 top (schematic designator R1)
R1_Out88 "1k0" R0805 6075,27695 r180 top (schematic designator R1)
R1_Out89 "1k0" R0805 6075,28000 r180 top (schematic designator R1)
R1_Out90 "1k0" R0805 6075,28305 r180 top (schematic designator R1)
R1_Out91 "1k0" R0805 6075,28610 r180 top (schematic designator R1)
R1_Out92 "1k0" R0805 6075,28915 r180 top (schematic designator R1)
R1_Out93 "1k0" R0805 6075,29220 r180 top (schematic designator R1)
R1_Out94 "1k0" R0805 6075,29525 r180 top (schematic designator R1)
R1_Out95 "1k0" R0805 6075,29830 r180 top (schematic designator R1)
R1_Out96 "1k0" R0805 6075,30135 r180 top (schematic designator R1)
R1_Out97 "1k0" R0805 6075,30440 r180 top (schematic designator R1)
R1_Out98 "1k0" R0805 6075,30745 r180 top (schematic designator R1)
R1_Out99 "1k0" R0805 6075,31050 r180 top (schematic designator R1)
R1_Out100 "1k0" R0805 6075,31355 r180 top (schematic designator R1)

## Footprints (in the part's own frame and the unit in brackets; to place one, negate y for a bottom-side part, rotate by r counter-clockwise, add the part's x,y. Pads: shape width x height; smd on the part's side, far side on the other; paste and mask are expansions set on the pad)
LED-0805 [mm] "SMT LED DIODE 0805"
  rrect25% 0.8x1.3 smd: 1(-0.9,0) 2(0.9,0)
  silkscreen extent -1.6,-0.9 1.6,0.9, body extent -1.01,-0.62 1.01,0.63, height 1.1
R0805 [mm] "SMD RESISTOR 0805"
  rrect25% 0.8x1.3 smd: 1(-0.9,0) 2(0.9,0)
  silkscreen extent -1.6,-0.9 1.6,0.9, body extent -1,-0.62 1,0.63, height 0.45
TB508-02 [mm] "Vertical terminal block 0.2 inch (5.08mm) pitch"
  oval 2.2x3.5 hole 1.5: 1(-2.54,0) 2(2.54,0)
  silkscreen extent -5.08,-5.4 5.08,4.8, body extent -5.67,-4.75 5.06,4.75, height 15
TB508-05 [mm] "Vertical terminal block 0.2 inch (5.08mm) pitch"
  oval 2.2x3.5 hole 1.5: 1(-10.16,0) 2(-5.08,0) 3(0,0) 4(5.08,0) 5(10.16,0)
  silkscreen extent -12.7,-5.4 12.7,4.8, body extent -13.24,-4.78 12.71,4.75, height 15.12